# EAGLE board wind_direction_circuit (EAGLE 9.7.0)

Size 288.72 x 62.52 mm. Coordinates in mm from the lower left corner, seen from the top.
Outline: 0,0 288.72,0 288.72,62.52 0,62.52 0,0
Copper layers (1*16): Top 0.035mm / dielectric 1.5mm / Bottom 0.035mm
Design rules "default": minimum track width 6mil, minimum drill 0.35mm, track to track 6mil, track to pad 6mil, pad to pad 6mil, via to via 6mil, smd to smd 6mil, copper to edge 40mil, drill to drill 6mil, minimum pad ring 10mil, minimum via ring 8mil, stop-mask expansion 4mil, vias tented up to drill 0mil, thermal gap 10mil

## Footprints (pad centres in the part's own frame; a part is rotated, then mirrored left to right if it is on the bottom)
CAP-THRU-2.54MM = drill 1.016 pad 1.88: 1 -1.27,0; 2 1.27,0
CAPPRD254W65D500H1150B = drill 0.85 pad 1.45: 1 -1.27,0; 2 1.27,0
BATTERY-GENERIC = drill 1.118 pad 3.15 octagon: + 2.54,0; - -2.54,0
RESAD1016W63L850D250B = drill 0.83 pad 1.43: 1 -5.08,0; 2 5.08,0
DIP826W53P254L959H508Q8B = drill 0.786 pad 1.386: 1 -4.13,3.81; 2 -4.13,1.27; 3 -4.13,-1.27; 4 -4.13,-3.81; 5 4.13,-3.81; 6 4.13,-1.27; 7 4.13,1.27; 8 4.13,3.81
ARDUINO-UNO-R3-SHIELD = drill 1.016 pad 1.88: 3.3V 24.13,-2.54; 5V 24.13,0; A0 24.13,12.7; A1 24.13,15.24; A2 24.13,17.78; A3 24.13,20.32; A4 24.13,22.86; A5 24.13,25.4; AREF -24.13,-13.97; D2 -24.13,20.32; D3 -24.13,17.78; D4 -24.13,15.24; D5 -24.13,12.7; D6 -24.13,10.16; D7 -24.13,7.62; D8 -24.13,3.81; D9 -24.13,1.27; D10 -24.13,-1.27; D11 -24.13,-3.81; D12 -24.13,-6.35; D13 -24.13,-8.89; GND@0 24.13,2.54; GND@1 24.13,5.08; GND@2 -24.13,-11.43; IOREF 24.13,-7.62; NC 24.13,-10.16; RES 24.13,-5.08; RX -24.13,25.4; SCL -24.13,-19.05; SDA -24.13,-16.51; TX -24.13,22.86; VIN 24.13,7.62

## Placement (x,y rotation side)
C1  10n  [CAP-THRU-2.54MM]  232.23,28.85 270 top
C2  1u  [CAPPRD254W65D500H1150B]  219.87,54.25 210 top
C3  100n  [CAP-THRU-2.54MM]  204.29,51.71 270 top
C4  100n  [CAP-THRU-2.54MM]  242.39,51.71 90 top
P1  BATTERYGENERIC  [BATTERY-GENERIC]  280.46,17.07 180 top
R1  56k  [RESAD1016W63L850D250B]  252.55,25.04 180 top
R2  56k  [RESAD1016W63L850D250B]  237.31,22.5 180 top
R3  56k  [RESAD1016W63L850D250B]  232.23,12.34 270 top
R4  56k  [RESAD1016W63L850D250B]  250.01,50.44 90 top
R5  18k  [RESAD1016W63L850D250B]  252.55,47.9 90 top
R6  56k  [RESAD1016W63L850D250B]  194.13,32.66 90 top
R7  56k  [RESAD1016W63L850D250B]  199.21,19.96 0 top
R8  4.7k  [RESAD1016W63L850D250B]  168.73,25.04 0 top
U1  OPAMP_DIP  [DIP826W53P254L959H508Q8B]  246.2,31.39 90 top
U2  OPAMP_DIP  [DIP826W53P254L959H508Q8B]  208.1,31.39 90 top
U3  ARDUINO-UNO-R3-SHIELD  [ARDUINO-UNO-R3-SHIELD]  47.88,29.84 270 top

## Library data of the parts
C1-C4 P1 R1-R8 U1-U3 = Tinkercad

## Nets
P1+: C2.2 C3.1 C4.2 P1.+ R5.2
P1-: C1.1 C2.1 C3.2 C4.1 P1.- R3.2 R4.2 U1.4 U2.4
U1_+IN: R1.2 U1.3
U1_-IN: R2.1 U1.1 U1.2
U1_ON2: R4.1 R5.1 U1.5
U1_OUT: R6.2 U1.6 U1.7
U2_+IN: C1.2 R2.2 R3.1 U2.3
U2_-IN: R6.1 R7.1 U2.2
U2_ON1: R7.2 R8.2 U2.1

## Tracks (layer width: path | path; a pad name or v marks a point on that pad's centre or on a via)
P1+  (4 unrouted)
P1-  (8 unrouted)
U1_+IN  (1 unrouted)
U1_-IN  (2 unrouted)
U1_ON2  (2 unrouted)
U1_OUT  (2 unrouted)
U2_+IN  (3 unrouted)
U2_-IN  (2 unrouted)
U2_ON1  (2 unrouted)